# EAGLE board laserdriver (EAGLE 7.3.0)
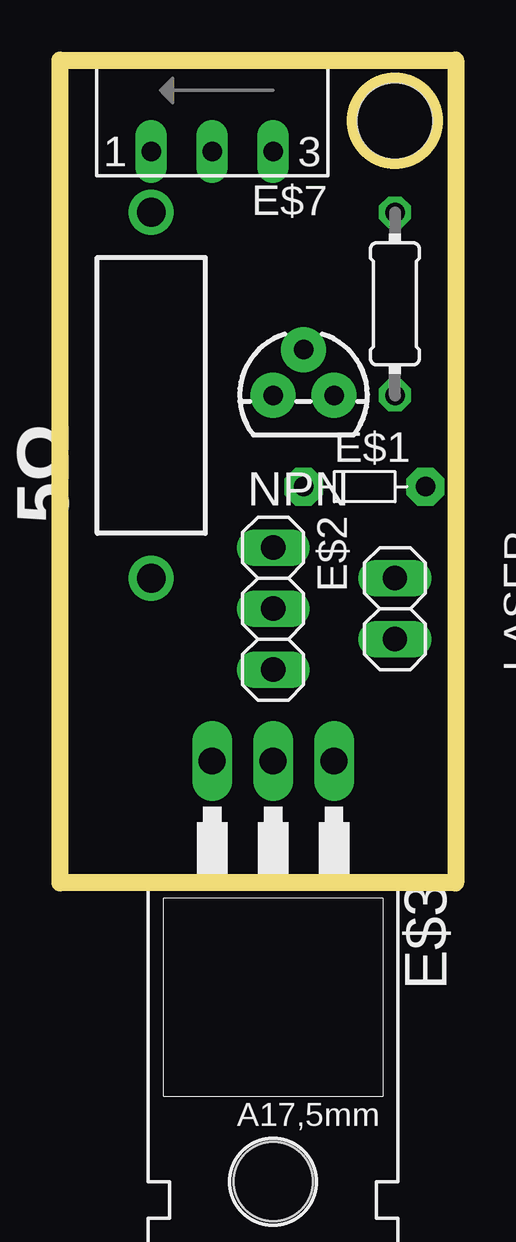
[diagram p0: board, top side]
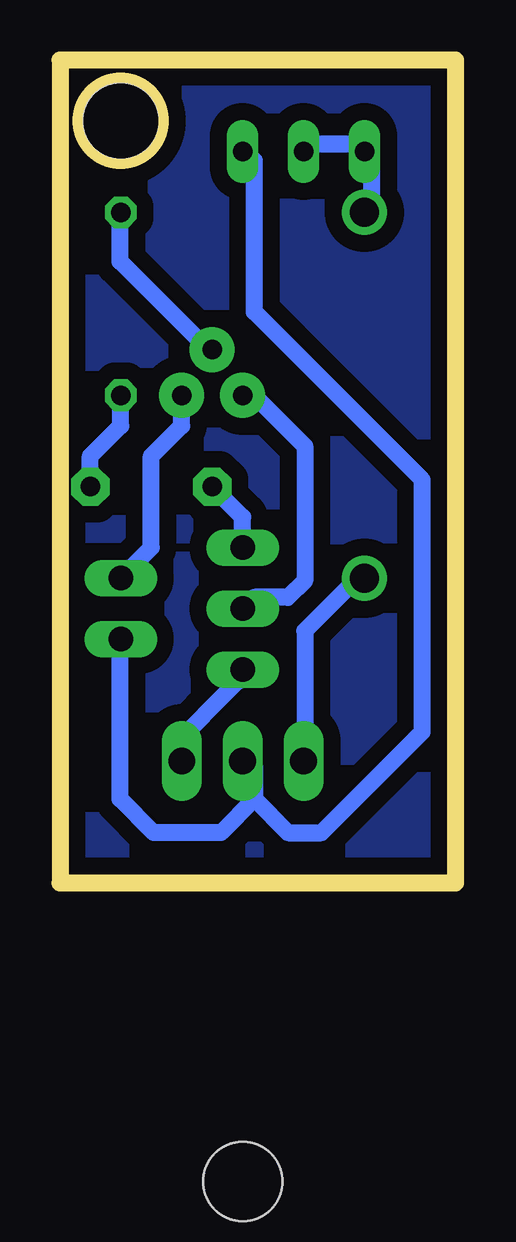
[diagram p1: board, bottom side, seen from below]

Size 16.51 x 34.29 mm. Coordinates in mm from the lower left corner, seen from the top.
Outline: 16.51,34.29 16.51,0 0,0 0,34.29 16.51,34.29
Outline: circle at 13.97,31.75 radius 1.8
Copper layers (1*16): Top 0.035mm / dielectric 1.5mm / Bottom 0.035mm
Design rules "default *": minimum track width 0.7mm, minimum drill 24mil, track to track 0.7mm, track to pad 0.7mm, pad to pad 0.7mm, via to via 0.7mm, smd to smd 8mil, copper to edge 0.7mm, drill to drill 8mil, minimum pad ring 10mil, minimum via ring 8mil, stop-mask expansion 4mil, vias tented up to drill 0mil, thermal gap 10mil
Holes 3.2 mm at 13.97,31.75

## Footprints (pad centres in the part's own frame; a part is rotated, then mirrored left to right if it is on the bottom)
R-5 = drill 0.813 pad 1.6 octagon: 1 -2.54,0; 2 2.54,0
1X03 = drill 1.016 long: 1 -2.54,0; 2 0,0; 3 2.54,0
TO220AB = drill 1.118 long: A1 -2.54,-6.35; A2 2.54,-6.35; C 0,-6.35 | hole 3.302: 0,11.176
AXIAL-0.6 = drill 1.2 pad 1.88: P$1 -7.62,0; P$2 7.62,0
S63S = drill 0.813 long: A 2.54,1.27; E -2.54,1.27; S 0,1.27
0204/7 = drill 0.813 octagon: 1 -3.81,0; 2 3.81,0
1X02 = drill 1.016 long: 1 -1.27,0; 2 1.27,0
TO-92 = drill 0.813 pad 1.88: 1 -1.27,0; 2 0,1.905; 3 1.27,0

## Placement (x,y rotation side)
E$1  [R-5]  12.7,16.51 0 top
E$2  [1X03]  8.89,11.43 270 top
E$3  [TO220AB]  8.89,-1.27 180 top
E$4  5Ω  [AXIAL-0.6]  3.81,20.32 270 top
E$7  [S63S]  6.35,31.75 180 top
E$9  220Ω  [0204/7]  13.97,24.13 90 top
LASER  [1X02]  13.97,11.43 270 top
NPN  [TO-92]  10.16,20.32 0 top

## Library data of the parts
E$1 = discrete
E$2 LASER = pinhead
E$3 = diode
E$4 = SparkFun-Resistors
E$7 = pot
E$9 = eagle-ltspice
NPN = SparkFun-DiscreteSemi

## Nets
12V: E$2.3 E$3.A1
GND: E$2.2 NPN.1
S$1: E$3.C E$7.E LASER.2
S$2: E$1.2 E$9.1
S$3: E$1.1 E$2.1
S$16: E$3.A2 E$4.P$2
S$18: E$4.P$1 E$7.A E$7.S
S$20: E$9.2 NPN.2
S$21: LASER.1 NPN.3

## Tracks (layer width: path | path; a pad name or v marks a point on that pad's centre or on a via)
12V
  Bottom 0.7: E$2.3 9.1,8.4 11.9,5.6 E$3.A1
GND
  Bottom 0.7: E$2.2 8.4,11.9 7,11.9 6.3,12.6 6.3,18.2 8.4,20.3 NPN.1
S$1
  Bottom 0.7: 8.4,3.5 7,2.1 5.6,2.1 1.4,6.3 1.4,16.8 8.4,23.8 8.4,30.1 E$7.E | 8.4,3.5 8.4,4.9 E$3.C | 8.4,3.5 9.8,2.1 12.6,2.1 14,3.5 14,9.8 LASER.2
S$2
  Bottom 0.7: E$1.2 15.24,17.78 13.97,19.05 E$9.1
S$3
  Bottom 0.7: E$2.1 8.89,15.24 E$1.1
S$4
  pour Bottom: 0,0 16.51,0 16.51,34.29 0,34.29
S$16
  Bottom 0.7: E$3.A2 6.3,5.6 6.3,10.5 4.2,12.6 E$4.P$2
S$18
  Bottom 0.7: E$7.S 6.3,30.8 4.2,30.8 E$7.A 3.5,30.1 3.5,28 E$4.P$1
S$20
  Bottom 0.7: E$9.2 14,27.3 14,25.9 10.5,22.4 NPN.2
S$21
  Bottom 0.7: LASER.1 12.7,13.97 12.7,17.78 11.43,19.05 NPN.3